# EAGLE board minigame (EAGLE 7.1.0)
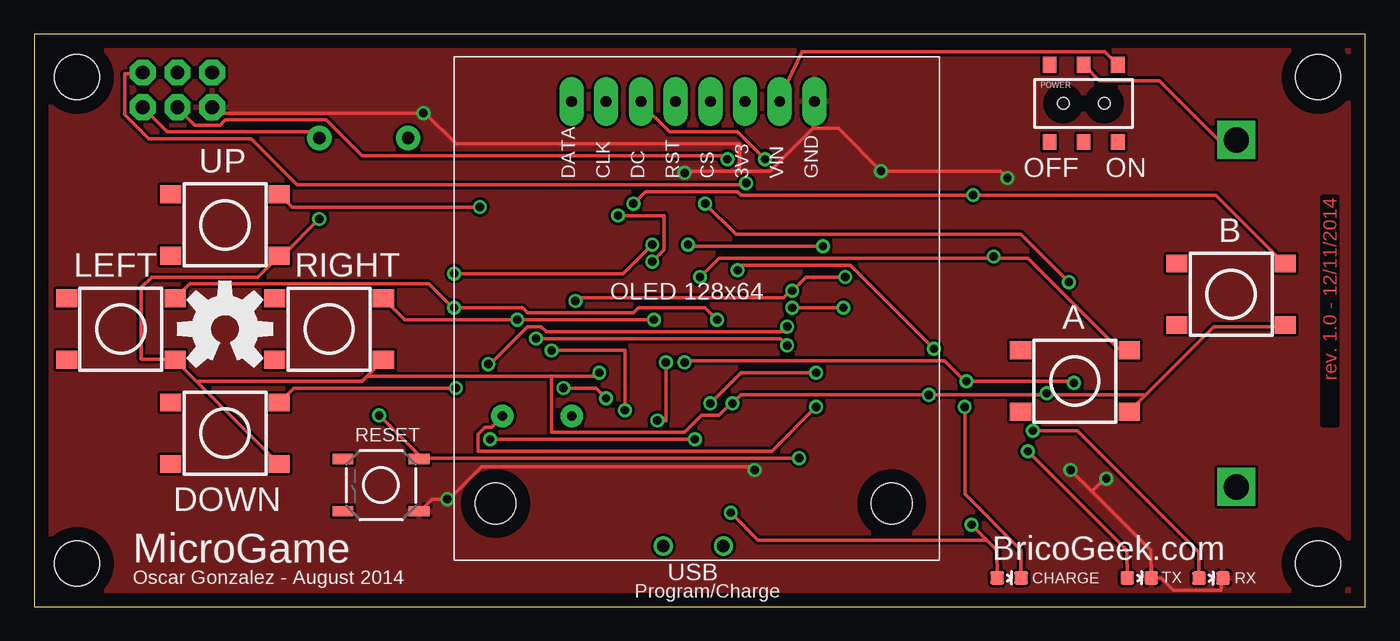
[diagram p0: board, top side]
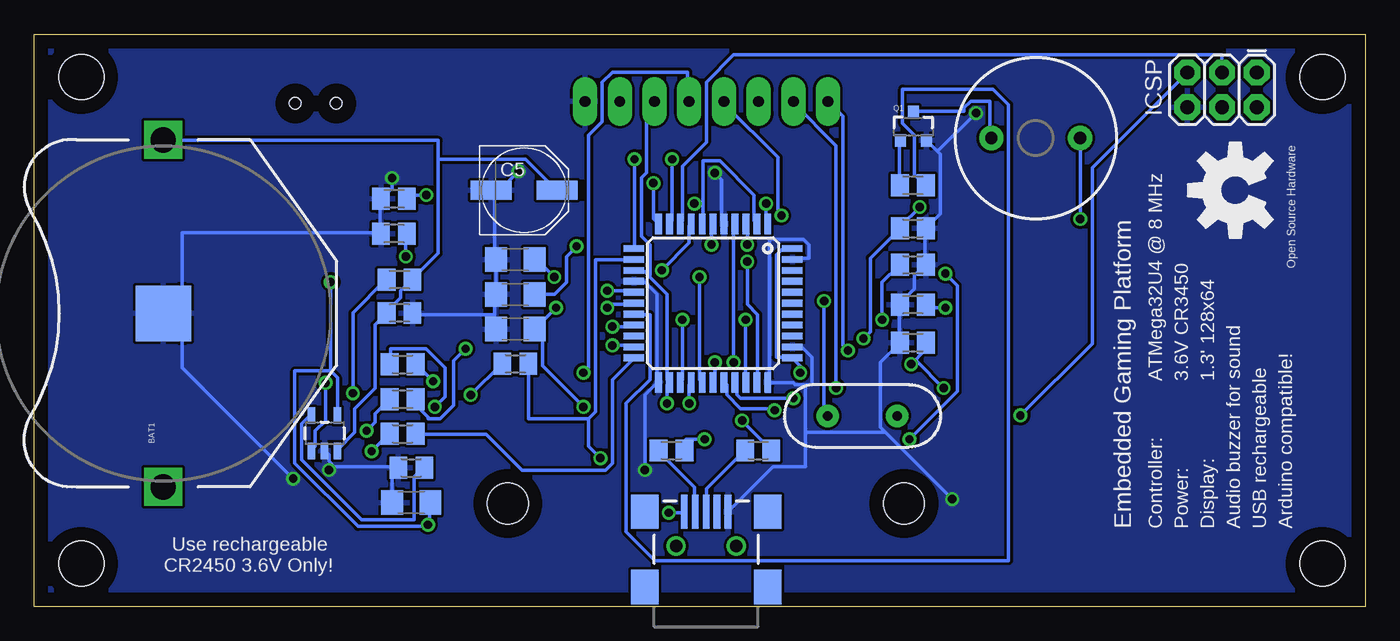
[diagram p1: board, bottom side, seen from below]

Size 97.46 x 41.9 mm. Coordinates in mm from the lower left corner, seen from the top.
Outline: 0,0 97.46,0 97.46,41.9 0,41.9 0,0
Copper layers (1*16): Top 0.035mm / dielectric 1.5mm / Bottom 0.035mm
Design rules "default": minimum track width 10mil, minimum drill 24mil, track to track 8mil, track to pad 8mil, pad to pad 8mil, via to via 8mil, smd to smd 8mil, copper to edge 40mil, drill to drill 8mil, minimum pad ring 10mil, minimum via ring 8mil, stop-mask expansion 4mil, vias tented up to drill 0mil, thermal gap 10mil

## Footprints (pad centres in the part's own frame; a part is rotated, then mirrored left to right if it is on the bottom)
BATTCON_245MM_PTH = drill 1.854 square: 1 -12.7,0; 3 12.7,0 | smd 4.064 x 4.064: 2 0,0
1206 = smd 1.6 x 1.8: 1 -1.4,0; 2 1.4,0
PANASONIC_D = smd 3 x 1.4: + 2.4,0; - -2.4,0
2X3 = drill 1.016 pad 1.88 octagon: 1 0,0; 2 0,2.54; 3 2.54,0; 4 2.54,2.54; 5 5.08,0; 6 5.08,2.54
USB-MINIB-NOSTOP = smd 2.5 x 0.5: D+ 2.5,0; D- 2.5,0.8; GND 2.5,-1.6; ID 2.5,-0.8; VBUS 2.5,1.6 | smd 2.5 x 2: G1 -3,-4.5; G2 -3,4.5; G3 2.5,4.5; G4 2.5,-4.5 | drill 0.9 pad 0.8: H1 0,2.2 | drill 0.9 pad 0.787: H2 0,-2.2
LED-0603 = smd 1 x 1: A 0,-0.877; C 0,0.877
938 = drill 0.8 pad 1.778 long: 3V3 21.31,-3.26; CLK 11.15,-3.26; CS 18.77,-3.26; DATA 8.61,-3.26; DC 13.69,-3.26; GND 26.39,-3.26; RST 16.23,-3.26; VIN 23.85,-3.26 | hole 3: 3.05,-32.69; 32.05,-32.69
AYZ0202 = smd 1 x 1.15: 1 -2.5,2.825; 2 0,2.825; 3 2.5,2.825; 4 -2.5,-2.825; 5 0,-2.825; 6 2.5,-2.825 | hole 0.85: 1.5,0; -1.5,0
SOT23-3 = smd 0.8 x 0.9: 1 -0.95,-1; 2 0.95,-1; 3 0,1.1
M0805 = smd 1.3 x 1.6: 1 -0.95,0; 2 0.95,0
TACTILE-SWITCH-SMD = smd 1.524 x 0.762: 1 -2.794,1.905; 2 2.794,1.905; 3 -2.794,-1.905; 4 2.794,-1.905
TACTILE_SWITCH_TALL = smd 1.55 x 1.3: A1 -3.975,-2.25; A2 3.975,-2.25; B1 -3.975,2.25; B2 3.975,2.25
BUZZER-12MM = drill 0.9 pad 1.778: + 3.25,0; - -3.25,0
SOT23-5 = smd 0.55 x 1.2: 1 -0.95,-1.3; 2 0,-1.3; 3 0.95,-1.3; 4 0.95,1.3; 5 -0.95,1.3
TQFP44 = smd 1.5 x 0.5: 1 -5.8,4; 2 -5.8,3.2; 3 -5.8,2.4; 4 -5.8,1.6; 5 -5.8,0.8; 6 -5.8,0; 7 -5.8,-0.8; 8 -5.8,-1.6; 9 -5.8,-2.4; 10 -5.8,-3.2; 11 -5.8,-4; 23 5.8,-4; 24 5.8,-3.2; 25 5.8,-2.4; 26 5.8,-1.6; 27 5.8,-0.8; 28 5.8,0; 29 5.8,0.8; 30 5.8,1.6; 31 5.8,2.4; 32 5.8,3.2; 33 5.8,4 | smd 0.5 x 1.5: 12 -4,-5.8; 13 -3.2,-5.8; 14 -2.4,-5.8; 15 -1.6,-5.8; 16 -0.8,-5.8; 17 0,-5.8; 18 0.8,-5.8; 19 1.6,-5.8; 20 2.4,-5.8; 21 3.2,-5.8; 22 4,-5.8; 34 4,5.8; 35 3.2,5.8; 36 2.4,5.8; 37 1.6,5.8; 38 0.8,5.8; 39 0,5.8; 40 -0.8,5.8; 41 -1.6,5.8; 42 -2.4,5.8; 43 -3.2,5.8; 44 -4,5.8
STAND-OFF = hole 3.302: 0,0
HC49US = drill 0.7 pad 1.651: 1 -2.54,0; 2 2.54,0

## Placement (x,y rotation side)
BAT1  3.6V-PRT-10319  [BATTCON_245MM_PTH]  88.01,21.46 90 bottom
C1  22pF  [1206]  62.23,20.32 0 bottom
C2  22pF  [1206]  62.23,25.4 0 bottom
C3  1uF  [1206]  62.23,22.86 0 bottom
C4  4.7uF  [1206]  69.85,7.62 0 bottom
C5  10uF  [PANASONIC_D]  61.59,30.48 0 bottom
ICSP  AVR_SPI_PRG_6PTH  [2X3]  7.95,39.09 180 bottom
JP1  USB-SMD-NS  [USB-MINIB-NOSTOP]  48.26,4.45 90 bottom
LED1  RED  [LED-0603]  71.38,2.1 270 top
LED2  YELLOW  [LED-0603]  80.91,2.1 270 top
LED3  BLUE  [LED-0603]  86.16,2.09 270 top
OLED128X64  OLED128X64-ADAFRUIT938  [938]  30.73,40.23 0 top
POWER  ON/OFF  [AYZ0202]  76.83,36.83 0 top
Q1  MMBT2222A  [SOT23-3]  33.1,35.13 0 bottom
R1  10k  [M0805]  62.23,17.78 180 bottom
R2  22  [M0805]  50.8,11.43 180 bottom
R3  22  [M0805]  44.45,11.43 180 bottom
R4  10k  [M0805]  33.12,27.69 180 bottom
R5  10k  [M0805]  33.12,19.3 0 bottom
R6  10k  [M0805]  33.12,22.1 0 bottom
R7  10k  [M0805]  33.12,25.02 180 bottom
R8  10k  [M0805]  71.12,27.3 0 bottom
R9  10k  [M0805]  71.12,29.84 0 bottom
R10  30k  [M0805]  69.85,10.16 180 bottom
R11  470  [M0805]  70.48,17.73 180 bottom
R12  180  [M0805]  33.12,30.84 0 bottom
R13  330  [M0805]  70.48,12.65 180 bottom
R14  330  [M0805]  70.48,15.19 180 bottom
R15  10k  [M0805]  70.71,23.93 0 bottom
R16  10k  [M0805]  70.71,21.49 0 bottom
S1  RESET  [TACTILE-SWITCH-SMD]  25.4,8.89 180 top
S2  DOWN  [TACTILE_SWITCH_TALL]  13.97,12.7 0 top
S3  LEFT  [TACTILE_SWITCH_TALL]  6.35,20.32 0 top
S4  RIGHT  [TACTILE_SWITCH_TALL]  21.59,20.32 0 top
S5  A  [TACTILE_SWITCH_TALL]  76.2,16.51 0 top
S6  B  [TACTILE_SWITCH_TALL]  87.63,22.86 0 top
S9  UP  [TACTILE_SWITCH_TALL]  13.97,27.94 0 top
SG1  BUZZERPTH  [BUZZER-12MM]  24.13,34.29 0 bottom
U1  MCP73831  [SOT23-5]  76.2,12.7 0 bottom
U$1  ATMEGA32U4TQFP-44  [TQFP44]  47.75,22.21 270 bottom
U$2  [STAND-OFF]  3.15,38.76 0 top
U$3  [OSHW-LOGO-L]  13.97,20.32 0 top
U$4  [STAND-OFF]  3.15,3.15 0 top
U$5  [STAND-OFF]  94.01,3.15 0 top
U$6  [STAND-OFF]  94.01,38.76 0 top
U$7  [OSHW-LOGO-L]  9.53,30.48 90 bottom
Y1  8MHz  [HC49US]  36.83,13.97 0 bottom

## Library data of the parts
BAT1 S1 SG1 U$2 U$4-U$6 = SparkFun-Electromechanical
C1-C4 = SparkFun-Passives
C5 = SparkFun-Capacitors
ICSP JP1 = SparkFun-Connectors
LED1-LED3 = SparkFun-LED
OLED128X64 = oled-128x64-adafruit-938
POWER = SparkFun-Electromechanical; PROD_ID: SWCH-08179
Q1 = SparkFun-DiscreteSemi; PROD_ID: TRANS-08049
R1-R16 = rcl
S2-S6 S9 = SparkFun-Electromechanical; PROD_ID: SWCH-11966
U1 = SparkFun-PowerIC; PROD_ID: IC-09995
U$1 = SparkFun-DigitalIC
U$3 U$7 = SparkFun-Aesthetics
Y1 = SparkFun-FreqCtrl

## Nets
3.3V: ICSP.2 OLED128X64.3V3 R1.2 R15.1 S2.A2 S3.A2 S4.A2 S5.A2 S6.A2 S9.A2 SG1.+ U$1.14 U$1.24 U$1.34 U$1.44
A: R8.2 S5.B2 U$1.27
B: R9.2 S6.B2 U$1.1
BUZZER: R12.2 U$1.18
CHARGE: R11.1 U1.1 U$1.28
D+: R3.1 U$1.4
D-: R2.1 U$1.3
DOWN: R5.2 S2.B2 U$1.19
GND: BAT1.2 C1.1 C2.1 C3.1 C4.1 C5.- ICSP.6 JP1.GND LED2.C LED3.C OLED128X64.GND Q1.2 R4.1 R5.1 R6.1 R7.1 R8.1 R9.1 R10.2 R16.2 S1.1 U1.2 U$1.5 U$1.15 U$1.23 U$1.33 U$1.35 U$1.43
LEFT: R6.2 S3.B2 U$1.25
MISO: ICSP.1 U$1.11
MOSI: ICSP.4 U$1.10
N$1: C1.2 U$1.17 Y1.2
N$2: C2.2 U$1.16 Y1.1
N$3: Q1.3 SG1.-
N$4: JP1.D- R2.2
N$5: JP1.D+ R3.2
N$6: C3.2 U$1.6
N$7: R10.1 U1.5
N$9: LED1.C R11.2
N$11: Q1.1 R12.1
N$12: LED2.A R13.2
N$13: LED3.A R14.2
N$15: R13.1 U$1.22
N$16: R14.1 U$1.8
OLED_CLK: OLED128X64.CLK U$1.30
OLED_CS: OLED128X64.CS U$1.26
OLED_DATA: OLED128X64.DATA U$1.29
OLED_DC: OLED128X64.DC U$1.12
OLED_RST: OLED128X64.RST U$1.32
POWER: OLED128X64.VIN POWER.3
RIGHT: R7.2 S4.B2 U$1.31
RST: ICSP.5 R1.1 S1.3 U$1.13
SCK: ICSP.3 U$1.9
UP: R4.2 S9.B2 U$1.21
VBAT: BAT1.3 C5.+ POWER.2 R15.2 R16.1 U1.3
VBUS: C4.2 JP1.VBUS LED1.A U1.4 U$1.2 U$1.7

## Tracks (layer width: path | path; a pad name or v marks a point on that pad's centre or on a via)
3.3V  (via drill 0.61)
  Top 0.254: SG1.+ 20.88,34.38 20.5,34.75 9.75,34.75 8,36.5 ICSP.2 | 11.94,16.44 10.38,18 S3.A2 10.25,18.12 7.86,18.12 7.86,23.38 8.61,24.12 16.38,24.12 17.88,25.62 S9.A2 18,25.75 18.25,25.75 v20.88,28.38 | 11.94,16.44 17.88,10.5 S2.A2 | 24.44,16.94 24,16.5 12,16.5 11.94,16.44 | 24.44,16.94 25.5,18 S4.A2 | v41.38,17.12 41.12,16.88 37.88,16.88 | 37.88,16.88 24.5,16.88 24.44,16.94 | 81.31,15.44 86.38,20.5 91.5,20.5 S6.A2 | 81.31,15.44 80.25,14.38 S5.A2 | 74.12,15.5 81.25,15.5 81.31,15.44 | 74.12,15.5 v65.5,15.5 51.75,15.5 v51.12,14.88 51,14.88 50.12,14 48.88,14 47.62,12.75 37.88,12.75 37.88,16.88 | v74.12,15.62 74.12,15.5
  Bottom 0.254: U$1.44 42,26.12 42.75,26.12 43.12,25.75 43.12,18.25 42,18.25 U$1.34 41.88,18.12 41.38,17.62 v41.38,17.12 | v20.88,28.38 20.88,34.25 SG1.+ | 52.44,24.19 52.75,24.5 53.5,24.5 U$1.14 | 52.44,24.19 51.12,22.88 51.12,16.62 51,16.5 U$1.24 51,16.38 51.12,16.25 v51.12,14.88 | OLED128X64.3V3 52.12,36.88 52.62,36.38 52.62,31.75 53,31.38 53,27.12 52.38,26.5 52.38,24.25 52.44,24.19 | v65.5,15.5 63.25,17.75 R1.2 | v74.12,15.62 74.12,21.5 71.75,23.88 R15.1
A  (via drill 0.61)
  Top 0.254: v48.75,24.12 50.12,25.5 70.25,25.5 | 70.25,25.5 72.75,25.5 79.38,18.88 80.12,18.88 S5.B2 | v70.25,25.62 70.25,25.5
  Bottom 0.254: v48.75,24.12 48.75,16.62 48.62,16.5 U$1.27 | v70.25,25.62 70.25,27.25 R8.2
B  (via drill 0.61)
  Top 0.254: v43.88,29.5 44.75,30.38 51.5,30.38 51.75,30.12 v68.75,30.12 86.5,30.12 91.5,25.12 S6.B2
  Bottom 0.254: v43.88,29.5 43.88,28.12 U$1.1 | v68.75,30.12 70.12,30.12 70.12,29.88 R9.2
BUZZER
  Bottom 0.254: U$1.18 53.5,21.38 52.38,21.38 52.38,16.62 54.12,14.88 54.12,5.5 52,3.38 26.12,3.38 26.12,36.75 27.25,37.88 33.88,37.88 33.88,35.38 33,34.5 33,31.62 32.25,30.88 R12.2
CHARGE  (via drill 0.61)
  Top 0.254: v76.12,16.38 76,16.5 v68.25,16.5 68.12,16.5 66.62,18 47.75,18 v47.62,17.88
  Bottom 0.254: v76.12,16.38 76.12,13.62 76.88,12.88 76.88,11.75 77.12,11.5 U1.1 | v68.25,16.5 69.5,17.75 R11.1 | v47.62,17.88 47.62,16.62 47.75,16.5 U$1.28
D+  (via drill 0.61)
  Top 0.254: v46.25,17.88 46.25,13.62 v45.62,13.62
  Bottom 0.254: v46.25,17.88 46.25,28 U$1.4 | v45.62,13.62 43.5,11.5 R3.1
D-  (via drill 0.61)
  Top 0.254: v45.25,26.5 43.12,24.38 v30.75,24.38 | v48.38,12.25 v33.38,12.25
  Bottom 0.254: v45.25,26.5 45.25,28 U$1.3 | v30.75,24.38 29.88,23.5 29.88,15.75 v33.38,12.25 | v48.38,12.25 49.75,12.25 49.75,11.5 R2.1
DOWN  (via drill 0.61)
  Top 0.254: v55.12,20.5 54.75,20.12 37.5,20.12 37.12,20.5 36.12,20.5 33.38,17.75 v33.25,17.75 | v30.88,16 19,16 18,15 S2.B2
  Bottom 0.254: v55.12,20.5 53.62,20.5 U$1.19 | R5.2 32.25,19.25 32.25,18.75 v33.25,17.75 32.88,18 v30.88,16
GND  (via drill 0.61)
  Top 0.254: LED3.C 87,1.97 86.89,1.22 83.39,1.22 82.51,2.1 LED2.C 81.75,4.12 77.44,8.44 | v75.88,10 77.44,8.44 | 77.44,8.44 78.38,9.38 v78.5,9.38 | v47.62,31.75 47.75,31.88 51.62,31.88 | 51.62,31.88 53.88,31.88 57,35 | 57,35 57,36.88 OLED128X64.GND | 57,35 58.88,35 v62,31.88 70.75,31.88 v71.25,31.38 | ICSP.6 13.12,36.5 13.5,36.12 v28.5,36.12 28.62,36.12 30.88,33.88 51.62,33.88 51.62,31.88 | S1.1 28.25,7 29.12,7.88 v30.25,7.88 30.38,7.88 32.75,10.25 52.5,10.25 v52.75,10
  Bottom 0.254: 75.56,10.31 75.5,10.25 70.88,10.25 R10.2 71.25,10.12 C4.1 | 75.56,10.31 75.88,10.62 75.88,11.12 76.12,11.38 U1.2 | 75.56,10.31 v75.88,10 | v78.5,9.38 86.62,17.5 86.62,21.38 BAT1.2 86.62,21.5 86.62,27.38 72.25,27.38 R8.1 72.12,27.38 72.12,29.75 R9.1 72,29.88 71.25,30.62 v71.25,31.38 | 63.75,21.38 69.75,21.38 R16.2 | 63.75,21.38 63.75,20.38 C1.1 | 63.75,21.38 63.75,22.75 C3.1 63.62,22.88 63.62,25.38 C2.1 63.75,25.5 63.75,30.25 63.88,30.38 C5.- 63.62,30.25 v62,31.88 | v47.62,31.75 47.12,31.25 47.12,28.25 47,28.12 U$1.5 | 31.31,33.31 31.12,33.12 31.12,28.75 32.12,27.75 R4.1 32.25,27.62 32.25,25.12 R7.1 32.25,25 33,24.25 33,23.25 34,22.25 34,22.12 R6.1 34.12,22 34.12,19.38 R5.1 34.12,19.25 35.5,17.88 35.5,13.12 35.19,12.81 | 31.31,33.31 32.12,34.12 Q1.2 | 31.31,33.31 v28.5,36.12 | 41,16.25 40.5,16.25 40.5,18.25 41.25,19 41.88,19 U$1.35 | 41,16.25 41.75,16.25 41.88,16.38 43.75,16.38 U$1.33 43.62,16.5 43.62,26.88 41.12,26.88 40.75,26.5 40.75,25.5 41.88,25.5 U$1.43 | 41,16.25 41,12.75 | 41,12.75 41,10.25 43.38,10.25 46.62,7 JP1.GND | U$1.15 53.5,23.75 52.75,23.75 51.88,22.88 51.88,16.5 U$1.23 51.88,16.38 52.75,15.5 v52.75,10 | 35.19,12.81 v30.25,7.88 | 41,12.75 35.25,12.75 35.19,12.81
  pour Top: 0,41.91 97.16,41.91 97.16,0 0,0
  pour Bottom: 0,41.91 97.79,41.91 97.79,0 0,0
LEFT  (via drill 0.61)
  Top 0.254: v50,21 49.12,21.88 44.25,21.88 43.88,21.5 36.12,21.5 35.75,21.88 v30.75,21.88 30.62,21.88 28.88,23.62 11.38,23.62 10.38,22.62 S3.B2
  Bottom 0.254: v50,21 50,16.62 50.12,16.5 U$1.25 | v30.75,21.88 32.12,21.88 32.12,22 R6.2
MISO  (via drill 0.61)
  Top 0.254: v52.12,31 52,30.88 19.25,30.88 15.88,34.25 8.38,34.25 6.62,36 6.62,39 7.88,39 ICSP.1
  Bottom 0.254: v52.12,31 52.12,28.38 51.88,28.12 U$1.11
MOSI  (via drill 0.61)
  Top 0.254: v50.75,32.75 50.5,33 24,33 21.38,35.62 14,35.62 13.62,35.25 11.75,35.25 10.5,36.5 ICSP.4
  Bottom 0.254: v50.75,32.75 50.75,28.25 50.88,28.12 U$1.10
N$1  (via drill 0.61)
  Top 0.254: v59.25,21.88 v55.5,21.88 | v57.25,14.62 54,11.38 32.5,11.38 32.5,12.62 33,13.12 33.5,13.12 34.25,13.88 Y1.2
  Bottom 0.254: v55.5,21.88 55.5,22.12 53.62,22.12 U$1.17 | v59.25,21.88 60.75,20.38 C1.2 60.25,20.75 60.25,17.62 v57.25,14.62
N$2  (via drill 0.61)
  Top 0.254: v59.38,24.12 56.5,24.12 v55.5,23.12 55.38,23.12 54.88,22.62 39.88,22.62 v39.62,22.38
  Bottom 0.254: v55.5,23.12 53.62,23.12 U$1.16 | v59.38,24.12 60.75,25.5 C2.2 | v39.62,22.38 39.62,14.25 39.38,14 Y1.1
N$3
  Bottom 0.254: Q1.3 33,36.25 29.38,36.25 29.38,36.5 28.88,37 27.5,37 27.5,34.38 SG1.-
N$4
  Bottom 0.254: R2.2 51.75,11.38 49.12,8.75 49.12,7 JP1.D-
N$5
  Bottom 0.254: R3.2 45.5,11.38 48.25,8.62 48.25,7 JP1.D+
N$6  (via drill 0.61)
  Top 0.254: v47.88,26.5 48,26.38 v57.75,26.38
  Bottom 0.254: v47.88,26.5 47.88,28 U$1.6 | v57.75,26.38 58.5,25.62 58.5,23.75 59.38,22.88 60.75,22.88 C3.2
N$7
  Bottom 0.254: U1.5 77.25,14 77.88,13.38 77.88,10.75 73.5,6.38 69.62,6.38 69.62,9.5 69,10.12 R10.1
N$8
  pour Top: 0,41.91 97.79,41.91 97.79,0 0,0
N$9  (via drill 0.61)
  Top 0.254: v68.12,14.62 68.12,8.25 72.25,4.12 LED1.C
  Bottom 0.254: v68.12,14.62 67.38,15.38 67.38,17.5 68.75,18.88 71.38,18.88 71.38,17.75 R11.2
N$10
  pour Bottom: 0,41.91 97.79,41.91 97.79,0 0,0
N$11
  Bottom 0.254: Q1.1 34.12,34.12 34.12,30.88 R12.1
N$12  (via drill 0.61)
  Top 0.254: v72.75,11.38 80,4.12 LED2.A
  Bottom 0.254: v72.75,11.38 71.5,12.62 R13.2
N$13  (via drill 0.61)
  Top 0.254: v73.12,12.88 76.38,12.88 85.25,4 LED3.A
  Bottom 0.254: v73.12,12.88 72.5,13.5 72.5,14.12 71.5,15.12 R14.2
N$15
  Bottom 0.254: U$1.22 53.62,18.12 55.12,16.62 55.12,10.5 55.62,10 61.75,10 64.38,12.62 69.5,12.62 R13.1
N$16  (via drill 0.61)
  Top 0.254: v51.5,24.62 51.88,25 59.75,25 v65.88,18.88
  Bottom 0.254: v51.5,24.62 49.5,26.62 49.5,27.88 49.38,28 U$1.8 | v65.88,18.88 66.75,18 66.75,14.75 67.75,13.75 68.62,13.75 68.62,13.88 69.5,14.75 69.5,15.12 R14.1
OLED_CLK  (via drill 0.61)
  Top 0.254: v41.88,15.25 41.12,16 v38.75,16
  Bottom 0.254: v41.88,15.25 45.75,15.25 46,15.5 46,16.25 46.12,16.38 U$1.30 | v38.75,16 38.75,33.75 41.88,36.88 OLED128X64.CLK
OLED_CS  (via drill 0.61)
  Top 0.254: v49.5,14.88 51.75,17.12 v57.25,17.12
  Bottom 0.254: v49.5,14.88 49.5,16.25 49.38,16.38 U$1.26 | v57.25,17.12 56.88,17.5 56.88,34.5 55.88,35.5 55.88,38.38 55.12,39.12 49.62,39.12 49.62,37 OLED128X64.CS
OLED_DATA  (via drill 0.61)
  Top 0.254: v43.25,14.38 43.25,18.75 v37.88,18.75
  Bottom 0.254: v43.25,14.38 43.25,14.5 45.75,14.5 46.75,15.5 46.75,16.25 46.88,16.38 U$1.29 | v37.88,18.75 38.25,19.12 38.25,35.88 39.25,36.88 OLED128X64.DATA
OLED_DC  (via drill 0.61)
  Top 0.254: v53.5,32.75 51.5,34.75 46.5,34.75 44.38,36.88 OLED128X64.DC
  Bottom 0.254: v53.5,32.75 53.5,26.25 U$1.12
OLED_RST  (via drill 0.61)
  Top 0.254: v45.25,25.25 46.12,26.12 46.12,28.62 v42.75,28.62
  Bottom 0.254: v45.25,25.25 45.25,22.12 44.5,21.38 44.5,16.5 U$1.32 | v42.75,28.62 43,28.88 43,32.88 46.88,36.75 46.88,36.88 OLED128X64.RST
POWER
  Top 0.254: POWER.3 79.25,39.75 78.38,40.62 56.22,40.62 54.5,37 OLED128X64.VIN
RIGHT  (via drill 0.61)
  Top 0.254: v45.38,21 v35.38,21 27.12,21 25.62,22.5 S4.B2
  Bottom 0.254: v45.38,21 45.38,16.5 U$1.31 | v35.38,21 35.38,23.75 34.12,25 R7.2
RST  (via drill 0.61)
  Top 0.254: v56,10.88 28.25,10.88 S1.3 28.25,11 v25.25,14
  Bottom 0.254: 56.88,13.75 56.38,14.25 56.38,25.38 53.62,25.38 U$1.13 | 56.88,13.75 61.25,13.75 61.25,17.75 R1.1 | v56,10.88 56.88,11.75 56.88,13.75 | v25.25,14 20,19.25 20,32.12 13.12,39 ICSP.5
SCK
  Bottom 0.254: U$1.9 50.12,28.12 50,28.25 50,32.25 48.25,34 48.25,38.38 46.25,40.38 10.5,40.38 10.5,39.12 ICSP.3
UP  (via drill 0.61)
  Top 0.254: v55.12,19.12 54.62,19.62 v36.75,19.62 | v32.62,29.25 18.88,29.25 18,30.12 S9.B2
  Bottom 0.254: v55.12,19.12 53.62,19.12 U$1.21 | v36.75,19.62 36.25,20.12 36.25,25.5 34.12,27.62 R4.2 34,27.75 34,27.88 v32.62,29.25
VBAT
  Top 0.254: POWER.2 76.88,39.62 78,38.5 82.38,38.5 86.62,34.25 BAT1.3
  Bottom 0.254: U1.3 75.25,11.5 74,12.75 74,14.5 72.5,16 72.5,20.62 71.75,21.38 R16.1 71.62,21.5 71.62,21.62 70.62,22.62 70.62,23.12 69.88,23.88 R15.2 69.75,24 67.88,25.88 67.88,32.75 | 67.88,32.75 61.5,32.75 59.25,30.5 C5.+ | 67.88,32.75 67.88,34.12 86.62,34.12 BAT1.3
VBUS  (via drill 0.61)
  Top 0.254: v68.62,6 69.69,4.94 | 69.69,4.94 70.5,4.12 LED1.A | v51,6.88 53,4.88 69.62,4.88 69.69,4.94 | v49.12,29.5 51.38,27.25 72.25,27.25 v75.75,23.75
  Bottom 0.254: 48.5,29.5 48.5,28.12 U$1.7 | 48.5,29.5 48.5,32.62 47.25,32.62 44.75,30.12 44.75,28.25 44.62,28.12 U$1.2 | C4.2 68.5,7.5 68.5,6.12 v68.62,6 68.62,5.88 73.75,5.88 78.38,10.5 78.38,17.25 75.75,17.25 | U1.4 75.25,16.75 75.75,17.25 | v51,6.88 49.88,6.88 JP1.VBUS | v49.12,29.5 48.5,29.5 | 75.75,17.25 v75.75,23.75

## Text on the board
Top: rev. 1.0 - 12/11/2014
tPlace: UP | OFF | ON | B | LEFT | RIGHT | A | RESET | DOWN | MicroGame | BricoGeek.com | Oscar Gonzalez - August 2014 | USB | CHARGE | TX | RX | Program/Charge
bPlace: Open Source Hardware | 1.3' 128x64 | 3.6V CR3450 | ATMega32U4 @ 8 MHz | Arduino compatible! | USB rechargeable | Audio buzzer for sound | Display: | Power: | Controller: | Embedded Gaming Platform | Use rechargeable / CR2450 3.6V Only!